# Altium PCB SMA_TL.PcbDoc
Units mm, origin at the board's own origin, x right, y up, seen from the top; angles counter-clockwise.
Board outline 80 x 20.5 mm, 2 copper layers (Top Layer, Bottom Layer), stack 1.535 mm thick; 2 components, 2 nets, 10 pads, 118 vias.
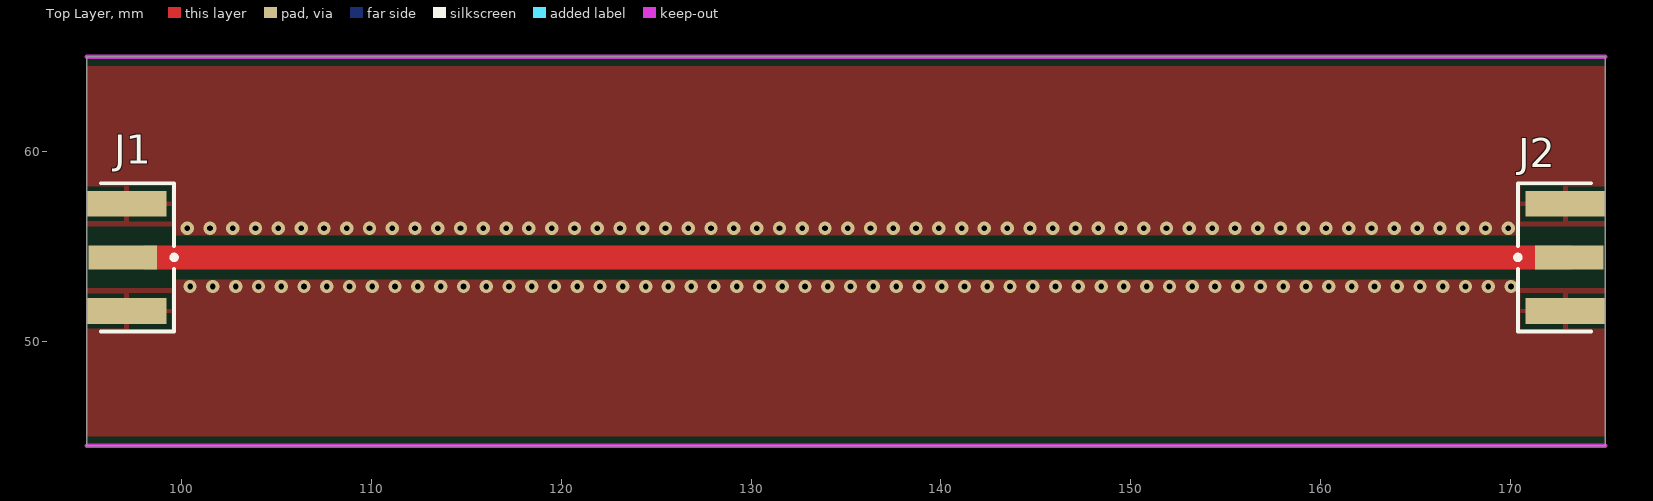
[diagram p0: Top Layer view]
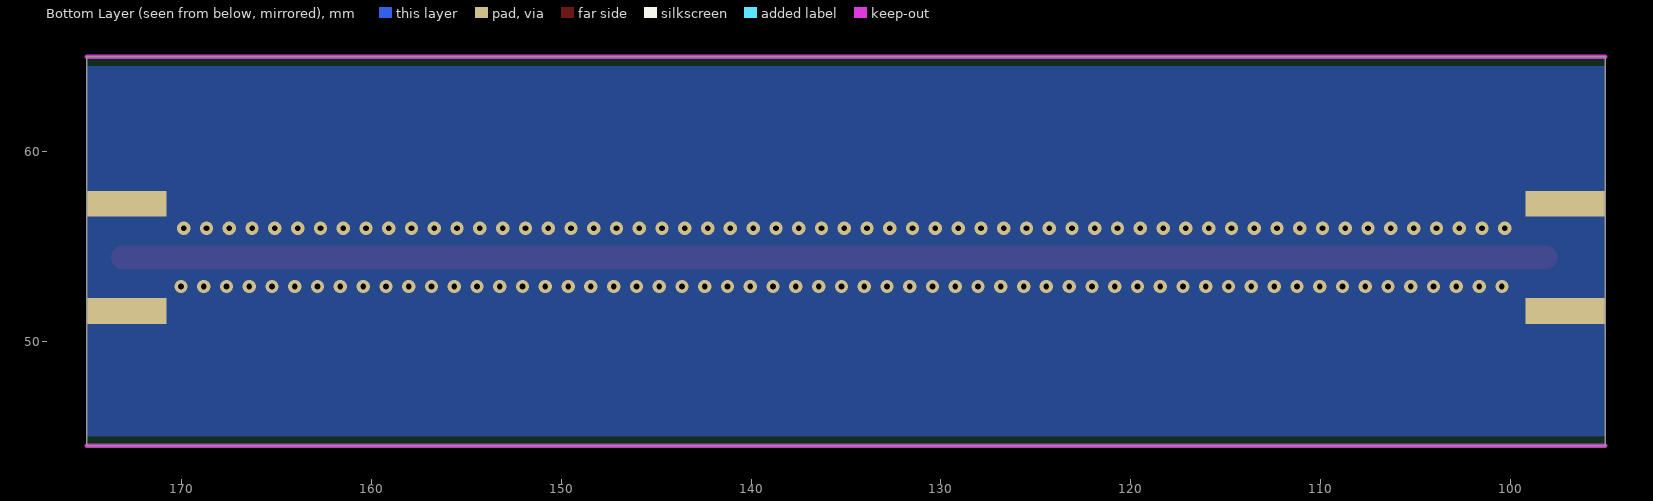
[diagram p1: Bottom Layer view, seen from below]

## Layer stack, top to bottom
Top Solder: solder mask 1.27, Solder Resist, Dk 3.5
Top Layer: signal copper 0.035
Dielectric 1: dielectric 1.465, FR-4, Dk 4.5
Bottom Layer: signal copper 0.035
Bottom Solder: solder mask 1.27, Solder Resist, Dk 3.5

## Board outline
115,44.5 175,44.5 175,65 95,65 95,44.5

## Design rules (kind name [scope] priority, off if disabled: settings)
AcuteAngle [All] p1: minimum=6.00000000000000E+0001 checktracksonly=FALSE
Clearance Clearance_RF_Trace [InNet('50ohm_TL')] p1: gap=0.2 ignorepadtopadclearanceinfootprint=FALSE except(0.532: Arc-Fill Arc-Poly Arc-Region Track-Fill Track-Poly Track-Region; 1: SMDPad-Fill SMDPad-Poly SMDPad-Region)
Clearance [All] p2: gap=0.2 ignorepadtopadclearanceinfootprint=FALSE
HoleToHoleClearance [All] p1: gap=0.45 allowstackedmicrovias=TRUE
MinimumAnnularRing [All] p1: minimumring=0.2
MinimumSolderMaskSliver [All] p1: minsoldermaskwidth=0.25
PlaneClearance [All] p1: clearance=0.5
PolygonConnect VIAS [iSvIA] p1: connectstyle=Direct reliefconductorwidth=0.254 reliefentries=4 polygonreliefangle="90 Angle" airgapwidth=0.254
PolygonConnect [All] p2: connectstyle=Relief reliefconductorwidth=0.254 reliefentries=4 polygonreliefangle="90 Angle" airgapwidth=0.254
RoutingVias [All] p1: holewidth=0.3 width=0.5 viastyle="Through Hole" minholewidth=0.3 minwidth=0.5 maxholewidth=0.6 maxwidth=0.8
SilkToSolderMaskClearance [IsPad] p1: minsilkscreentomaskgap=0.25 clearancetoexposedcopper=TRUE
SolderMaskExpansion [All] p1: expansion=0.102 istentingtop=FALSE
UnRoutedNet [All] p1: checkbadconnections=TRUE
Width Width_RF [InNetClass('RF Class')] p1: maxlimit=1.27 minlimit=1.27 preferedwidth=1.27 impedanceprofiledriven=TRUE impedanceprofileid={83CD0A11-F58D-4D65-83FD-9E403B2B4730} impedanceprofilevalue=50.000000 minimp=50.000000 maximp=50.000000 favimp=50.000000
Width [All] p2: maxlimit=0.254 minlimit=0.254 preferedwidth=0.254
25 further rules are at their usual default settings.

## Classes and differential pairs
pad class "SMA Class": J1-1 J2-1
net class "RF Class": 50ohm_TL

## Components (designator, comment, footprint, x,y, rotation, side; value= is the part's Value field where it differs from the comment)
J1 "SMA-J-P-H-ST-EM1" FP-SMA-J-P-H-ST-EM1-MFG 90.24,54.425 r270 top
J2 "SMA-J-P-H-ST-EM1" FP-SMA-J-P-H-ST-EM1-MFG 179.76,54.425 r90 top locked

## Footprints (in the part's own frame and the unit in brackets; to place one, negate y for a bottom-side part, rotate by r counter-clockwise, add the part's x,y. Pads: shape width x height; smd on the part's side, far side on the other; paste and mask are expansions set on the pad)
FP-SMA-J-P-H-ST-EM1-MFG [mm]
  rect 1.27x3.6 smd paste+0 mask+0: 1(0,6.66)
  rect 1.35x4.2 smd paste+0 mask+0: 2(-2.825,6.86) 3(2.825,6.86)
  rect 1.35x4.2 smd far side paste+0 mask+0: 4(-2.825,6.86) 5(2.825,6.86)
  silkscreen extent -3.9,5.5 3.9,9.49, body extent -3.6,-4.92 3.6,9.06, height 0.25

## Part data
J1 J2: library part CMP-02754-000006-1, "CONN SMA JACK STR 50OHM EDGE MNT", Case/Package=SMA, Dielectric Material=PTFE, Housing Color=Gold, Max Frequency=6GHz, Max Operating Temperature=125°C, Min Operating Temperature=-65°C, Package Quantity=1, Voltage Rating=335V, Body Material=Brass, Body Plating=Gold, Center Contact Plating=Gold, Connector Type=SMA, Contact Material=Copper, Contact Plating=Gold, Depth=13.33mm, Fastening Type=Threaded, Impedance=50R, Insulation Material=Polytetrafluoroethylene, Length=6.35mm, Mount=Edge, Orientation=Straight, Packaging=Tray, Radiation Hardening=No, RoHS Compliant=Yes, Series=SMA, Termination=Solder

## Via types
v1: diameter 0.7, hole 0.3, Top Layer to Bottom Layer, tented both sides, 118 vias

## Nets (pads, with @x,y where several pads share a name; then routed paths per layer and width w, separated by ;. In a path a pad name is that pad's centre, name@x,y a point inside that pad or via, vN(x,y) a via of type N, cw(c..) or ccw(c..) an arc to the next point about the centre after c; other vN are vias at no path point)
50ohm_TL: J1.1 J2.1 | length 75
  Top Layer w1.27: J1.1@98.14,54.425 171.563,54.425 J2.1
GND: J1.2 J1.3 J1.4 J1.5 J2.2 J2.3 J2.4 J2.5
  other v1: 100.442,52.895 101.642,52.895 102.842,52.895 104.042,52.895 105.242,52.895 106.442,52.895 107.642,52.895 108.842,52.895 110.042,52.895 111.242,52.895 112.442,52.895 113.642,52.895 114.842,52.895 116.042,52.895 117.242,52.895 118.442,52.895 119.642,52.895 120.842,52.895 122.042,52.895 123.242,52.895 124.442,52.895 125.642,52.895 126.842,52.895 128.042,52.895 129.242,52.895 130.442,52.895 131.642,52.895 132.842,52.895 134.042,52.895 135.242,52.895 136.442,52.895 137.642,52.895 138.842,52.895 140.042,52.895 141.242,52.895 142.442,52.895 143.642,52.895 144.842,52.895 146.042,52.895 147.242,52.895 148.442,52.895 149.642,52.895 150.842,52.895 152.042,52.895 153.242,52.895 154.442,52.895 155.642,52.895 156.842,52.895 158.042,52.895 159.242,52.895 160.442,52.895 161.642,52.895 162.842,52.895 164.042,52.895 165.242,52.895 166.442,52.895 167.642,52.895 168.842,52.895 170.042,52.895 100.292,55.955 101.492,55.955 102.692,55.955 103.892,55.955 105.092,55.955 106.292,55.955 107.492,55.955 108.692,55.955 109.892,55.955 111.092,55.955 112.292,55.955 113.492,55.955 114.692,55.955 115.892,55.955 117.092,55.955 118.292,55.955 119.492,55.955 120.692,55.955 121.892,55.955 123.092,55.955 124.292,55.955 125.492,55.955 126.692,55.955 127.892,55.955 129.092,55.955 130.292,55.955 131.492,55.955 132.692,55.955 133.892,55.955 135.092,55.955 136.292,55.955 137.492,55.955 138.692,55.955 139.892,55.955 141.092,55.955 142.292,55.955 143.492,55.955 144.692,55.955 145.892,55.955 147.092,55.955 148.292,55.955 149.492,55.955 150.692,55.955 151.892,55.955 153.092,55.955 154.292,55.955 155.492,55.955 156.692,55.955 157.892,55.955 159.092,55.955 160.292,55.955 161.492,55.955 162.692,55.955 163.892,55.955 165.092,55.955 166.292,55.955 167.492,55.955 168.692,55.955 169.892,55.955

## Polygon pours and split planes (outlines as drawn)
GND on Bottom Layer "GND" (solid, pour order 2): 94.975,45.025 95,45.025 95,64.5 175,64.5 175,45 95,45
GND on Top Layer "GND" (solid, pour order 0): 95,64.5 175,64.5 175,45 95,45

## Keep-outs
Keep-Out Layer:
  lines w0.254: 95,44.5 115,44.5 125,44.5 145,44.5 155,44.5 175,44.5 ; 95,65 130,65 140,65 175,65

## Other copper
Top Layer:
  pour cut-out: 171.563,55.603 173.1,55.603 173.151,55.592 173.203,55.592 173.215,55.59 174.9,55.59 175.103,55.55 175.275,55.435 175.39,55.263 175.43,55.06 175.43,53.79 175.39,53.587 175.275,53.415 175.103,53.3 174.9,53.26 173.215,53.26 173.203,53.258 173.151,53.258 173.1,53.247 171.563,53.247 98.14,53.247 98.089,53.258 98.037,53.258 98.025,53.26 95.1,53.26 94.897,53.3 94.725,53.415 94.61,53.587 94.57,53.79 94.57,55.06 94.61,55.263 94.725,55.435 94.897,55.55 95.1,55.59 98.025,55.59 98.037,55.592 98.089,55.592 98.14,55.603 171.563,55.603
  pour cut-out: 174.9,56 170.7,56 170.7,52.8 174.9,52.8
  pour cut-out: 95.1,56 99.3,56 99.3,52.8 95.1,52.8

## Silkscreen, mask and mechanical layers (free items; w line width, h text height)
Top Assembly:
  lines w0.254: 95,44.5 95,65 ; 175,44.5 175,65